# Altium PCB XIAO-HAT-3.PcbDoc
Units mm, origin at the board's own origin, x right, y up, seen from the top; angles counter-clockwise.
Board outline 17.78 x 20.96 mm, 2 copper layers (Top Layer, Bottom Layer); 17 components, 20 nets, 71 pads, 8 vias.
Unrouted connection lines stored in the file: 9.
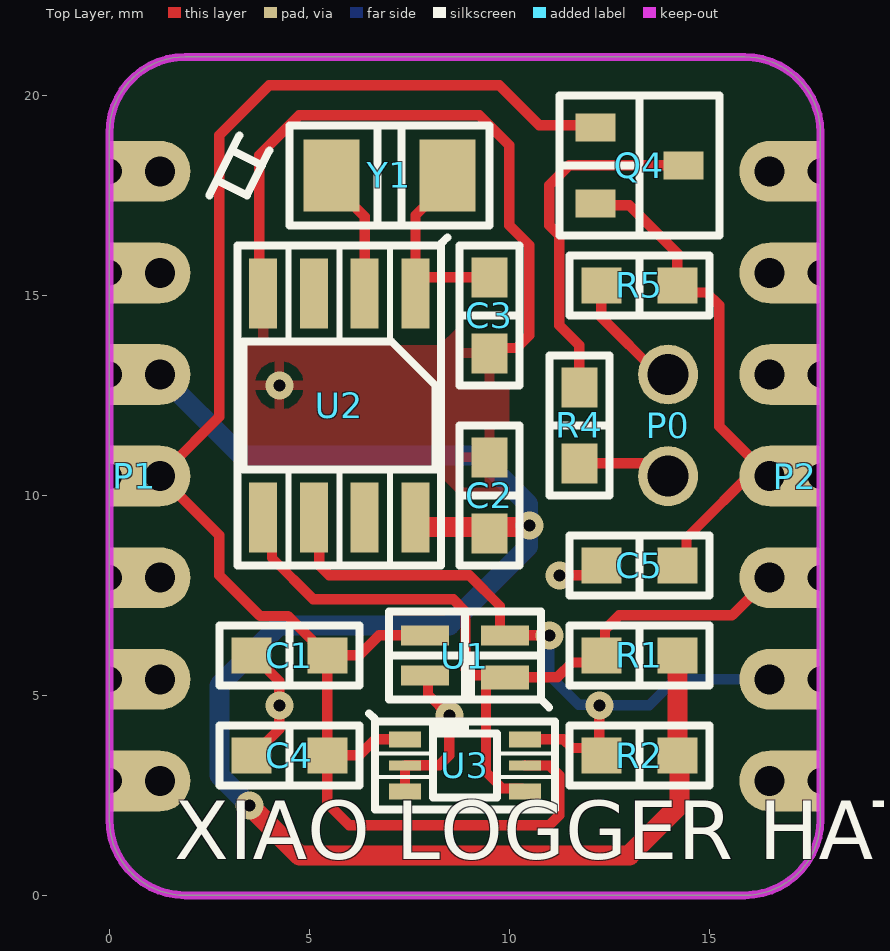
[diagram p0: Top Layer view]
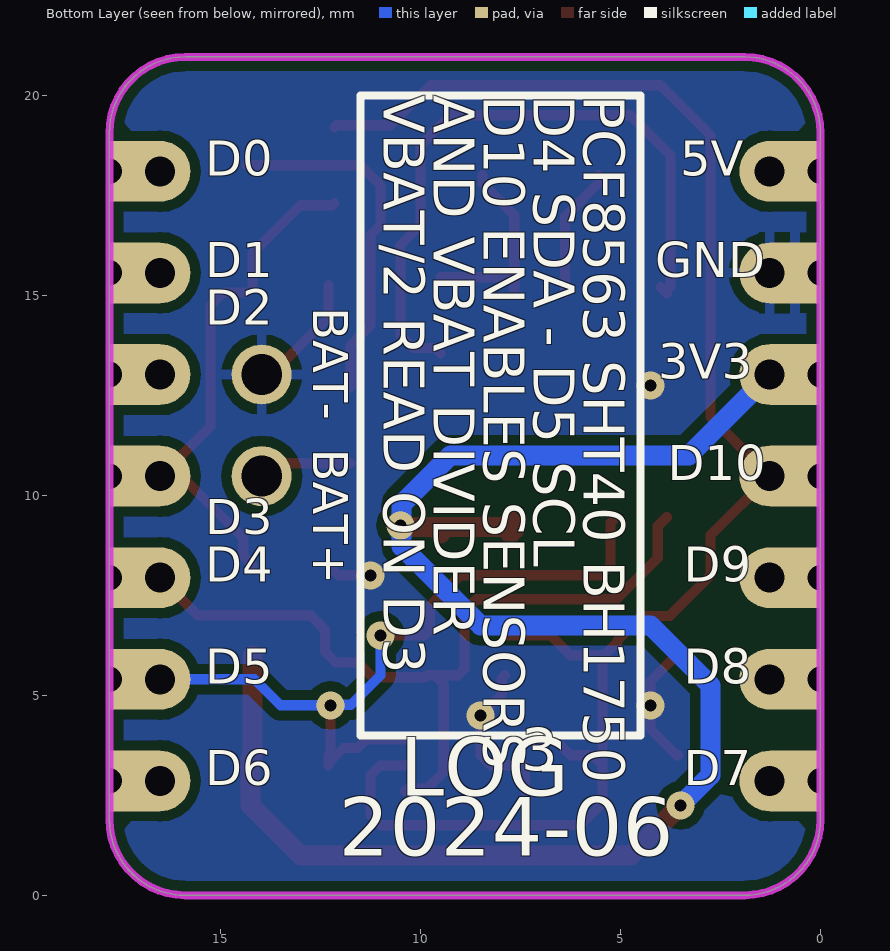
[diagram p1: Bottom Layer view, seen from below]

## Layer stack, top to bottom
Top Solder: solder mask 0.0102, Solder Resist, Dk 3.5
Top Layer: signal copper 0.0356
Dielectric 1: dielectric 0.32, FR-4, Dk 4.8
Bottom Layer: signal copper 0.0356
Bottom Solder: solder mask 0.0102, Solder Resist, Dk 3.5

## Board outline
0,1.9 ccw(c1.9,1.9) 1.9,0 15.88,0 ccw(c15.88,1.9) 17.78,1.9 17.78,19.06 ccw(c15.88,19.06) 15.88,20.96 1.9,20.96 ccw(c1.9,19.06) 0,19.06

## Design rules (kind name [scope] priority, off if disabled: settings)
Clearance [All] p1: gap=0.254 ignorepadtopadclearanceinfootprint=FALSE except(0: Arc-Hole Track-Hole SMDPad-Hole THPad-Hole Via-Hole Fill-Hole Poly-Hole Region-Hole Text-Hole; 0.2: Arc-SMDPad Track-SMDPad SMDPad-SMDPad)
MinimumSolderMaskSliver [All] p1: minsoldermaskwidth=0.15
PolygonConnect PolygonConnect_Via [All vs IsVia] p1: connectstyle=Direct reliefconductorwidth=0.254 reliefentries=4 polygonreliefangle="90 Angle" airgapwidth=0.254
PolygonConnect [All] p2: connectstyle=Relief reliefconductorwidth=0.254 reliefentries=4 polygonreliefangle="90 Angle" airgapwidth=0.254
RoomDefinition XIAO-HAT [InComponentClass('XIAO-HAT')] p1: confinementstyle=ConfineIn formatcopy=TRUE lockcomponents=FALSE outline -106.68,-83.185 -55.88,-83.185 -55.88,-57.785 -106.68,-57.785
RoutingVias [All] p1: holewidth=0.711 width=1.27 viastyle="Through Hole" minholewidth=0.711 minwidth=1.27 maxholewidth=0.711 maxwidth=1.27
SilkToSolderMaskClearance [IsPad] p1: minsilkscreentomaskgap=0.1 clearancetoexposedcopper=TRUE
SolderMaskExpansion [All] p1: expansion=0.102 istentingtop=FALSE
Width [All] p1: maxlimit=2 minlimit=0.2 preferedwidth=0.254 minimp=50.000000 maximp=50.000000 favimp=50.000000
28 further rules are at their usual default settings.

## Components (designator, comment, footprint, x,y, rotation, side; value= is the part's Value field where it differs from the comment)
C1 "Capacitor" 0603C-BOX 4.5,6 r180 top value=100n
C2 "Capacitor" 0603C-BOX 9.5,10 r90 top value=100n
C3 "Capacitor" 0603C-BOX 9.5,14.5 r270 top value=22p
C4 "Capacitor" 0603C-BOX 4.5,3.5 r180 top value=100n
C5 "Capacitor" 0603C-BOX 13.25,8.25 r180 top value=100n
P0 "BAT" 2P-2.54mm-NOSILK 13.97,11.75 r90 top locked value="2.54mm 1x2P"
P1 "7P2.54MM" 7P-2.54mm-XIAO 1.27,10.48 r270 top locked value="2.54mm 1x7P"
P2 "7P2.54MM" 7P-2.54mm-XIAO 16.51,10.48 r90 top locked value="2.54mm 1x7P"
Q4 "3400" "SOT23-3 M" 13.25,18.25 r270 top value=N-FET
R1 "Resistor" 0603R-BOX 13.25,6 r0 top value=10K
R2 "Resistor" 0603R-BOX 13.25,3.5 r0 top value=10K
R4 "Resistor" 0603R-BOX 11.75,11.75 r270 top value=100K
R5 "Resistor" 0603R-BOX 13.25,15.25 r0 top value=100K
U1 "SHT40" DFN-4-EP(1.5x1.5)-BOX 8.89,6 r180 top value=I2C
U2 "PCF8563" "SOP-8 M" 5.75,12.25 r180 top value=I2C
U3 "BH1750FVI" "WSOF6 M" 8.89,3.25 r0 top value=I2C
Y1 "Oscillator" "FC135 M" 7,18 r0 top value="32.768kHz 12.5pF"

## Footprints (in the part's own frame and the unit in brackets; to place one, negate y for a bottom-side part, rotate by r counter-clockwise, add the part's x,y. Pads: shape width x height; smd on the part's side, far side on the other; paste and mask are expansions set on the pad)
2P-2.54mm-NOSILK [mm] "2-pin 2.54mm thru hole general footprint"
  round 1.5 hole 1.02 mask+0.05: 1(-1.27,0) 2(1.27,0)
7P-2.54mm-XIAO [mm] "7-pin 2.54mm thru hole general footprint"
  rect 1.52x1.27 hole 0.64 copper offset 0,0.64 mask+0.05: 1(-7.62,-1.27) 2(-5.08,-1.27) 3(-2.54,-1.27) 4(0,-1.27) 5(2.54,-1.27) 6(5.08,-1.27) 7(7.62,-1.27)
  round 1.52 hole 0.75 mask+0.05: 1(-7.62,0) 2(-5.08,0) 3(-2.54,0) 4(0,0) 5(2.54,0) 6(5.08,0) 7(7.62,0)
0603C-BOX [mm] "0603 capacitor for manual soldering"
  rect 1x0.9 smd mask+0.05: 1(-0.95,0) 2(0.95,0)
  silkscreen extent -1.75,-0.75 1.75,0.75, body extent -0.85,-0.45 0.85,0.45, height 0.9
0603R-BOX [mm] "0603 resistor for manual soldering"
  rect 1x0.9 smd mask+0.05: 1(-0.95,0) 2(0.95,0)
  silkscreen extent -1.75,-0.75 1.75,0.75, body extent -0.85,-0.45 0.85,0.45, height 0.55
DFN-4-EP(1.5x1.5)-BOX [mm]
  rect 1.2x0.6 smd mask+0: 1(-1,0.55)
  rect 1.2x0.5 smd mask+0: 2(-1,-0.5) 3(1,-0.5) 4(1,0.5)
  silkscreen extent -2.1,-1.1 1.9,1.3, body extent -0.75,-0.75 0.75,0.75, height 0.56
"FC135 M" [mm] "1206 oscillator for manual soldering"
  rect 1.4x1.8 smd mask+0.05: 1(-1.45,0) 2(1.45,0)
  silkscreen extent -2.5,-1.25 2.5,1.25, body extent -1.6,-0.75 1.6,0.75, height 0.9
"SOP-8 M" [mm] "SOP-8 for manual soldering"
  rect 0.7x1.75 smd mask+0.05: 1(-1.905,-2.8) 2(-0.635,-2.8) 3(0.635,-2.8) 4(1.905,-2.8) 5(1.905,2.8) 6(0.635,2.8) 7(-0.635,2.8) 8(-1.905,2.8)
  silkscreen extent -2.7,-4.2 2.54,4, body extent -2.45,-3 2.45,3, height 1.75
"SOT23-3 M" [mm] "SOT23-3 for manual soldering"
  rect 0.7x1 smd mask+0.05: 1(-0.95,-1.1) 2(0.95,-1.1) 3(0,1.1)
  silkscreen extent -1.75,-2 1.75,2, body extent -1.45,-1.2 1.45,1.2, height 1.1
"WSOF6 M" [mm]
  rect 0.8x0.4 smd mask+0: 1(-1.5,0.65) 3(-1.5,-0.65) 4(1.5,-0.65) 6(1.5,0.65)
  rect 0.8x0.25 smd mask+0: 2(-1.5,0) 5(1.5,0)
  silkscreen extent -2.4,-1.1 2.25,1.3, body extent -1.5,-0.8 1.5,0.8, height 0.75

## Part data
C1 C2 C4 C5: "Capacitor 100nF ±10% 50V", Manufacturer=Samsung, Package=0603, Component=CL10B104KB8NNNC, Function=Decoupling
C3: "Capacitor 22pF ±5% 50V", Manufacturer=Samsung, Package=0603, Component=CL10C220JB8NNNC, Function="XO Cap"
P0: library part "2-pins Header", "General 2-pin connection", Component=none, Function="BAT CON"
P1 P2: library part "7-pins Header", "General 7-pin connection", Component=none, Function="XIAO CON"
Q4: library part MOSFET-N, "MOSFET N-channel 30V 5.7A", Manufacturer=UMW(友台半导体), Package=SOT23-3, Component=AO3400A, Function="VBAT-ADC EN"
R1 R2: "Resistor 10kΩ ±1% 1/16W", Manufacturer=UNI-ROYAL(厚声), Package=0603, Component=0603WAF1002T5E
  R1: Function="SDA pull-up"
  R2: Function="SCL pull-up"
R4 R5: "Resistor 100kΩ ±1% 100mW", Manufacturer=UNI-ROYAL(厚声), Package=0603, Component=0603WAF1003T5E, Function="VBAT DIV"
U1: "SHT40 temperature and humidity sensor", Manufacturer=Sensirion(瑞士盛思锐), Package=DFN_1.5x1.5MM, Component=SHT40-AD1B-R2, Function="T&H sensor"
U2: library part RTC-8563, "IC real-time clock with alarm interrupt", Manufacturer=NXP, Package=SOIC8_150MIL, Component=PCF8563T/5,518, Function=RTC
U3: library part BH1750, "Digital light sensor", Manufacturer=ROHM, Package=WSOF6_1.6X1.6MM, Component=BH1750FVI-TR, Function="light sensor"
Y1: library part XO-2, "Crystal oscillator 32.768kHz 20ppm 12.5pF", Manufacturer=TKD, Package=SMD3215_2P, Component=SF32K32768D31T-12.5, Function="RTC XO"

## Via types
v1: diameter 0.7, hole 0.3, Top Layer to Bottom Layer, tented both sides, 8 vias

## Nets (pads, with @x,y where several pads share a name; then routed paths per layer and width w, separated by ;. In a path a pad name is that pad's centre, name@x,y a point inside that pad or via, vN(x,y) a via of type N, cw(c..) or ccw(c..) an arc to the next point about the centre after c; other vN are vias at no path point)
3V3: C2.1 P1.3 R1.2 R2.2 U2.8 | length 43.1
  Top Layer w0.5: v1(3.5,2.25) 4.75,1 13,1 14.25,2.25 14.25,3.45 R2.2 R1.2 ; U2.8 7.655,9.15 U2.8@7.755,9.05 ; U2.8@7.75,9.212 C2.1@9.662,9.212 ; C2.1 C2.1@9.662,9.212 ; v1(10.5,9.25) 10.462,9.212 C2.1@9.662,9.212
  Bottom Layer w0.5: P1.3@1.27,13.02 3.29,11 9.25,11 10.472,9.778 10.472,9.278 v1(10.5,9.25) 10.472,9.222 10.472,8.722 8.5,6.75 4.25,6.75 2.75,5.25 2.75,3 v1(3.5,2.25)
BAT+: P0.1 R4.2 | length 2.4
  Top Layer w0.254: R4.2 13.65,10.8 P0.1
CLK: U2.7
D0/A0: P2.7
D1/A1: P2.6
D2/A2: P2.5
D3/A3: C5.1 P2.4 Q4.2 R5.2 | length 12.7
  Top Layer w0.254: Q4.2 12.2,17.25 13,17.25 14.2,16.05 R5.2 ; C5.1 14.432,8.482 14.432,8.932 P2.4@16.25,10.75 ; R5.2@14.382,15.068 14.932,15.068 15.25,14.75 15.25,11.725 16.238,10.738 P2.4@16.48,10.495 ; P2.4@16.347,10.317 16.51,10.48 P2.4@16.48,10.48
D4/SDA: P2.3 R1.1 U1.1 U2.5 U3.4 | length 20.6
  Top Layer w0.254: U2.5 4.068,9.227 4.068,8.432 5.1,7.4 8.6,7.4 8.904,7.096 8.904,5.649 9.053,5.5 9.84,5.5 U1.1 11.2,5.45 11.568,5.818 12.118,5.818 R1.1 12.39,6.09 12.39,6.64 12.75,7 15.57,7 P2.3@16.51,7.94 ; U1.1@9.59,5.45 9.417,5.277 9.417,3.083 9.83,2.67 10.32,2.67 U3.4
D5/SCL: P2.2 R2.1 U1.2 U2.6 U3.6 | length 18.9
  Top Layer w0.254: U2.6 5.25,9.315 5.25,8.25 5.5,8 9,8 9.768,7.232 9.768,6.622 U1.2 v1(11,6.5) ; U3.6 11.35,3.9 11.568,3.682 11.927,3.682 R2.1@12.3,3.309 ; v1(12.25,4.75) 12.25,3.55 R2.1 R2.1@12.3,3.309 ; R2.1@12.3,3.25 R2.1@12.3,3.309
  Bottom Layer w0.254: v1(11,6.5) 11,5.5 11.737,4.763 12.237,4.763 v1(12.25,4.75) 13.5,4.75 14.15,5.4 P2.2@16.51,5.4
D6/TX: P2.1
D7/RX: P1.7
D8/SCK: P1.6
D9/MISO: P1.5
D10/MOSI: C1.1 C4.1 P1.4 Q4.1 U1.3 U3.1 U3.5 | length 42.9
  Top Layer w0.254: U3.1 6.65,3.9 6.25,3.5 5.7,3.5 C4.1@5.45,3.25 ; U1.3 6.75,6.5 6.25,6 C1.1 ; U3.5 10.392,3.248 11.002,3.248 11.25,3 11.25,2 11,1.75 6,1.75 5.45,2.3 C4.1@5.45,3.25 ; Q4.1 12.1,19.25 10.75,19.25 9.75,20.25 4,20.25 2.75,19 2.75,11.96 1.48,10.69 1.48,10.48 1.27,10.48 2.75,9 2.75,8 3.765,6.985 4.465,6.985 5.077,6.373 5.077,6.323 5.4,6 C1.1 ; C4.1@5.45,3.25 C4.1 C1.1
GND: C1.2 C2.2 C3.2 C4.2 C5.2 P0.2 P1.2 R5.1 U1.4 U2.4 U3.2 U3.3 | length 28.4
  Top Layer w0.254: C4.2 3.6,3.5 4.25,4.15 4.25,5.35 3.6,6 C1.2 ; U2.4@3.75,15.205 3.75,18.5 4.75,19.5 9.25,19.5 10,18.75 10,16.75 10.5,16.25 10.5,14 10.182,13.682 9.632,13.682 C3.2 ; U2.4 U2.4@4,15.205 ; U3.3 U3.2 8.25,3.25 8.5,3.5 v1(8.5,4.5) ; U1.4 7.967,5.423 7.967,5.018 v1@8.485,4.5 ; C2.2 C2.2@9.7,10.75 ; v1(11.25,8) 12.05,8 C5.2 ; R5.1 12.3,14.45 13.73,13.02 P0.2
  other v1: 4.25,4.75 4.25,12.75
INT: U2.3
NetC3_1: C3.1 U2.1 Y1.2 | length 5.1
  Top Layer w0.254: U2.1 U2.1@7.655,15.45 ; Y1.2 8.45,17.8 7.655,17.005 U2.1@7.655,15.45 ; C3.1 U2.1@7.655,15.45
NetQ4_3: Q4.3 R4.1 | length 8.9
  Top Layer w0.254: R4.1 11.75,13.75 11.25,14.25 11.25,16.5 11,16.75 11,17.75 11.5,18.25 Q4.3
NetU2_2: U2.2 Y1.1 | length 3.3
  Top Layer w0.254: Y1.1 5.55,17.8 6.385,16.965 U2.2
VUSB: P1.1

## Polygon pours and split planes (outlines as drawn)
GND on Top Layer "GND_L01_P000" (solid, pour order 0): 10,14.25 10,10 8.75,10 8,10.75 3.25,10.75 3.25,16 4.5,16 4.5,13.75 8.25,13.75 8.75,14.25
GND on Bottom Layer "GND_L02_P002" (solid, remove dead copper, pour order 2): 0,0 17.78,0 17.78,20.96 0,20.96

## Keep-outs
Keep-Out Layer:
  the board outline again, w0.2

## Silkscreen, mask and mechanical layers (free items; w line width, h text height)
Top Overlay:
  lines w0.2: 2.5,17.5 2.688,17.875 ; 3.25,19 3.063,18.625 ; 4,18.625 3.813,18.25 ; 2.688,17.875 3.438,17.5 3.813,18.25 ; 2.688,17.875 3.063,18.625 ; 3.063,18.625 3.813,18.25
  text "XIAO LOGGER HAT" at 1.624,0.419 h2.5
Bottom Overlay:
  lines w0.2: 11.5,4 11.5,4 ; 11.5,4 4.5,4 4.5,20 11.5,20 ; 11.5,4 11.5,20 ; 11.5,20 11.5,20
  text "D10 ENABLES SENSORS" at 8.75,20.003 h1.75 r90
  text "PCF8563 SHT40 BH1750" at 6.25,20 h1.75 r90
  text "D4 SDA - D5 SCL" at 7.5,20 h1.75 r90
  text "AND VBAT DIVIDER" at 10,20 h1.75 r90
  text "VBAT/2 READ ON D3" at 11.25,20 h1.75 r90
  text "5V" at 3.503,17.705 h1.5
  text "D0" at 15.38,17.705 h1.5
  text "GND" at 4.135,15.165 h1.5
  text "D1" at 15.38,15.165 h1.5
  text "BAT-" at 12.97,14.703 h1.5 r90
  text "D2" at 15.38,13.975 h1.5
  text "3V3" at 4.056,12.625 h1.5
  text "BAT+" at 12.97,11.162 h1.5 r90
  text "D10" at 3.819,10.085 h1.5
  text "D3" at 15.38,8.735 h1.5
  text "D9" at 3.425,7.545 h1.5
  text "D4" at 15.38,7.545 h1.5
  text "D8" at 3.425,5.005 h1.5
  text "D5" at 15.38,5.005 h1.5
  text "3" at 7.486,2.776 h1.8
  text "D7" at 3.425,2.465 h1.5
  text "D6" at 15.38,2.465 h1.5
  text "LOG" at 10.521,2 h2.5
  text "2024-06" at 12.046,0.5 h2.5